# EAGLE board OpenBook_Schematic_v14 (EAGLE 9.7.0)
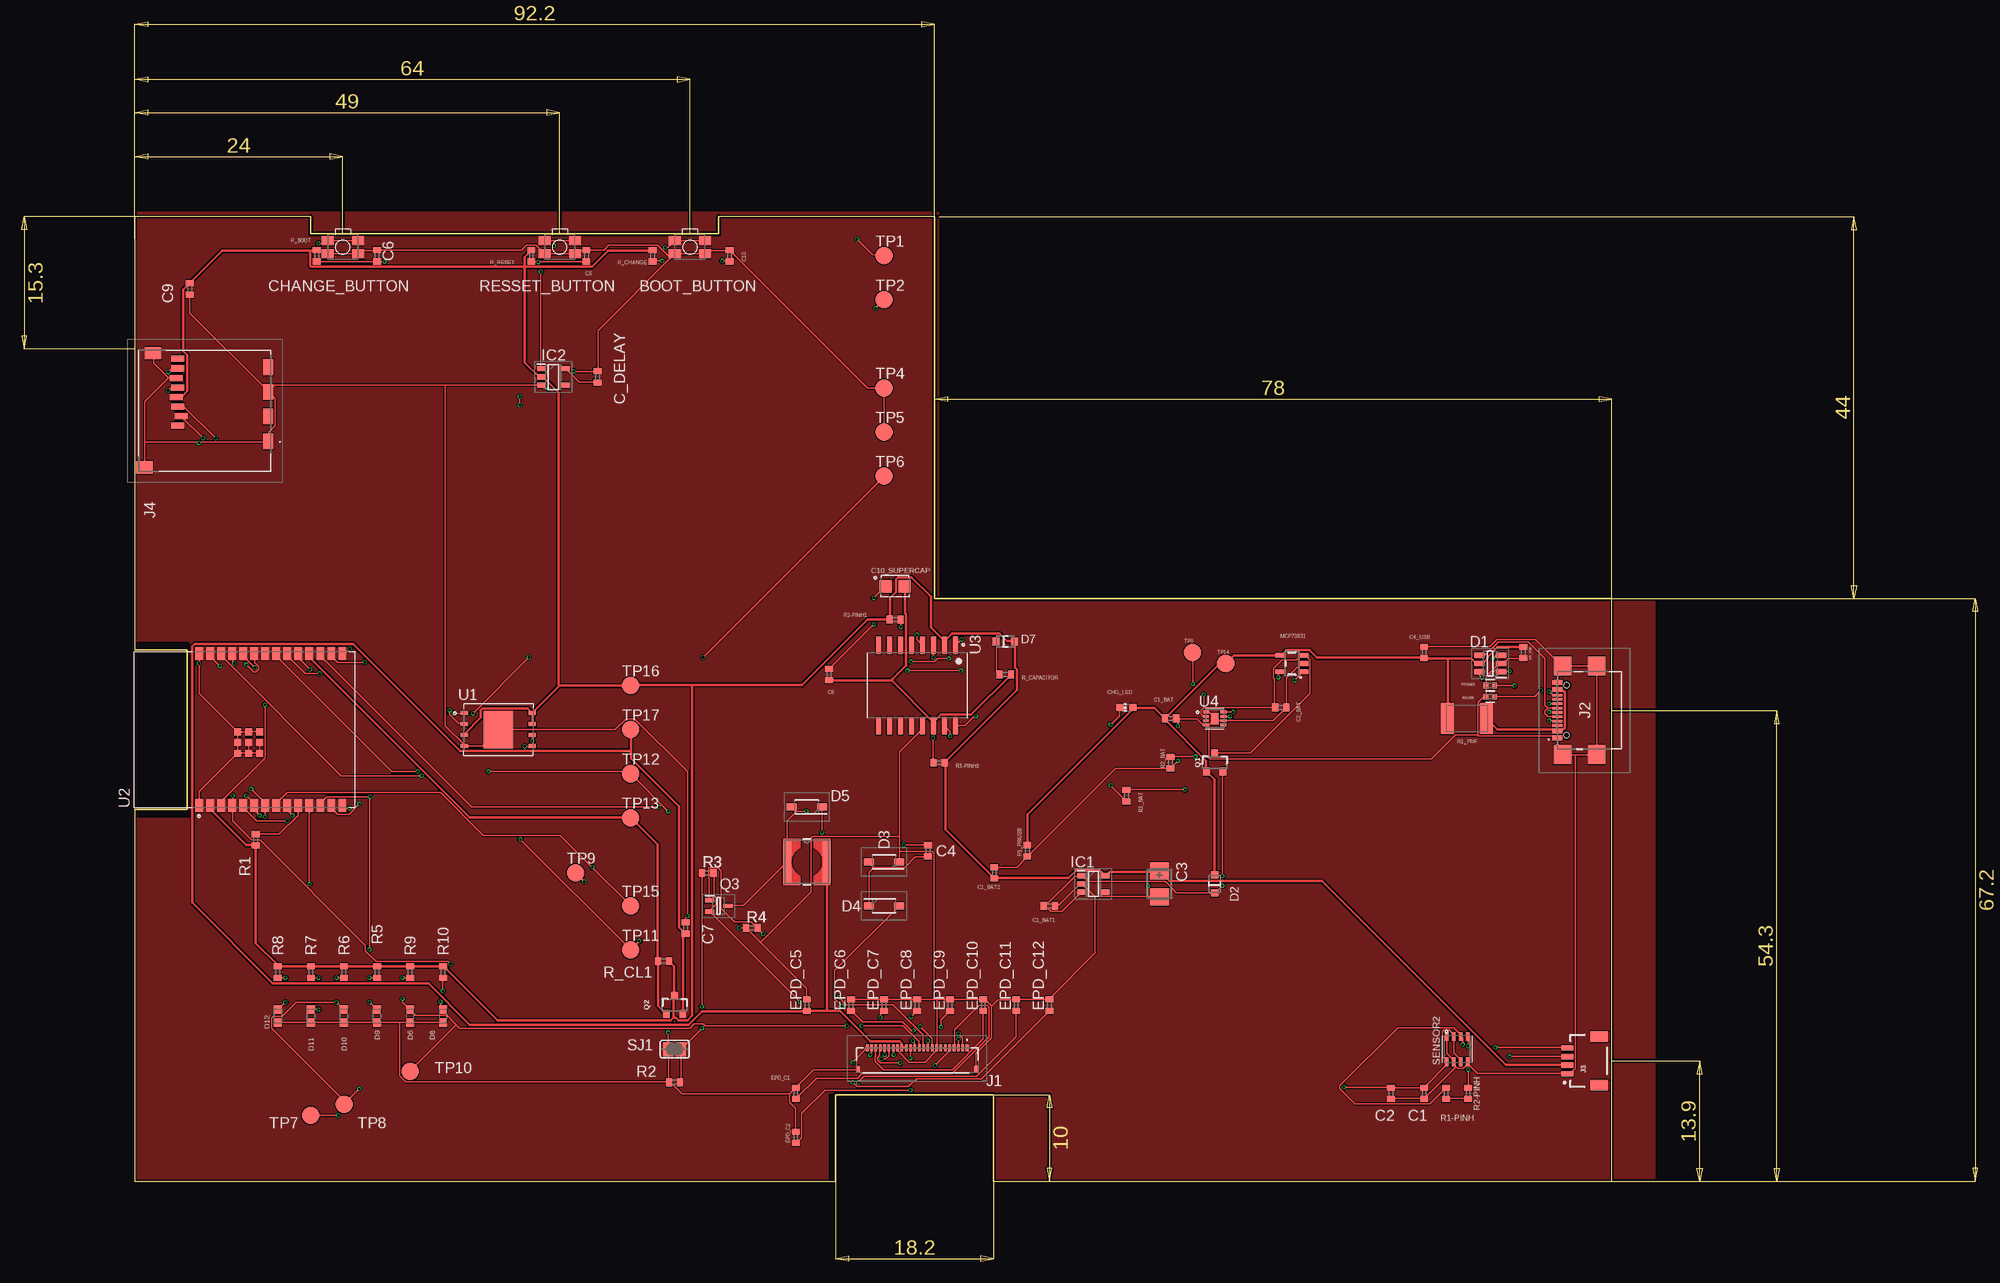
[diagram p0: board, top side]
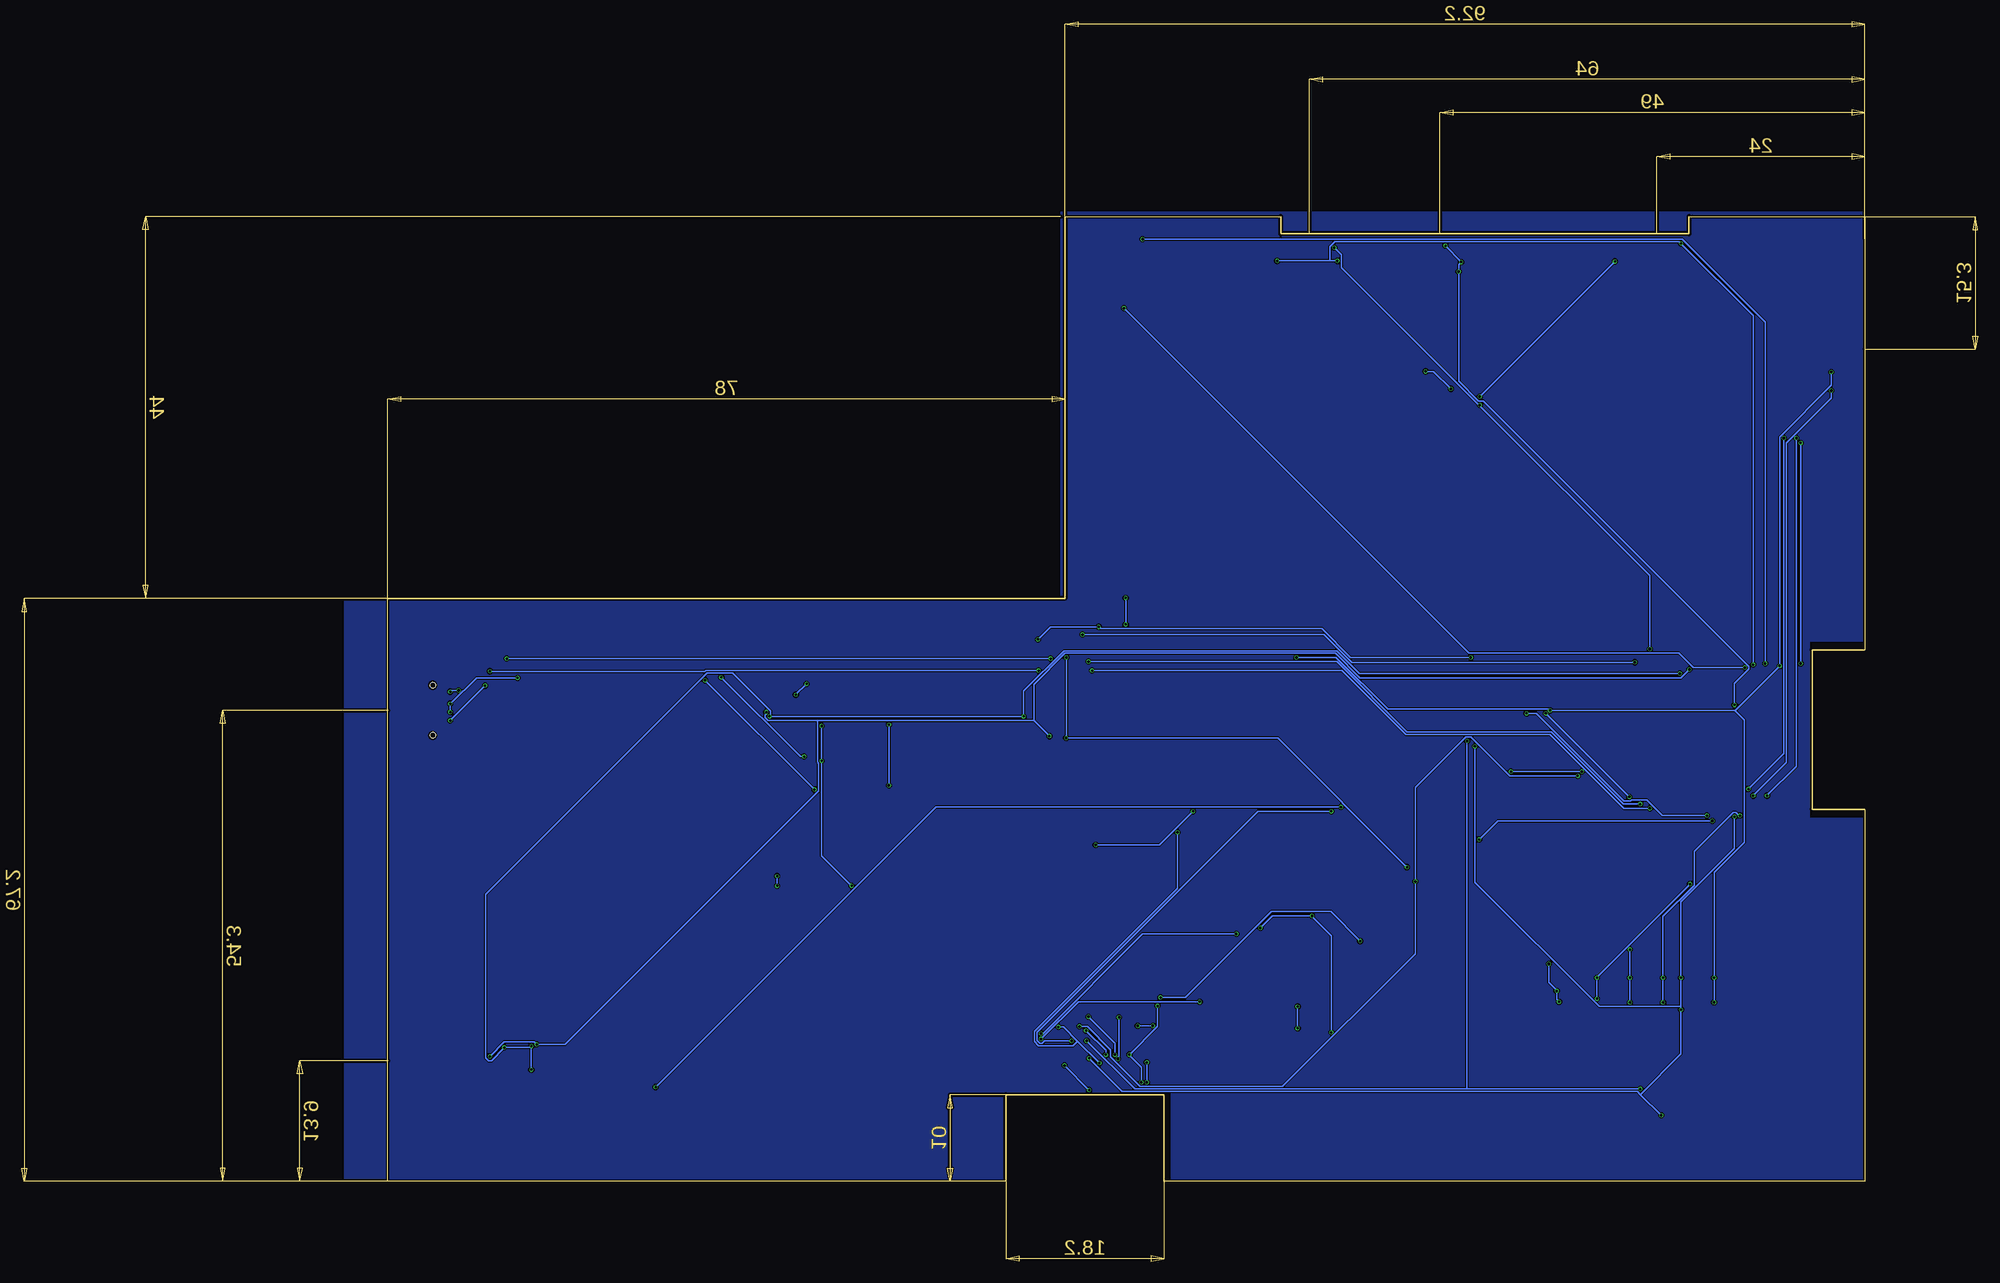
[diagram p1: board, bottom side, seen from below]

Size 170.2 x 111.2 mm. Coordinates in mm from the lower left corner, seen from the top.
Outline: 0,0 80.8,0 80.8,10 99,10 99,0 170.2,0 170.2,67.2 92.2,67.2 92.2,111.2 67.31,111.2 67.31,109.22 20.28,109.22 20.28,111.2 0,111.2 0,61.26 6.08,61.26 6.08,42.88 0,42.88 0,0
Copper layers (1*16): Top 0.035mm / dielectric 1.6mm / Bottom 0.035mm
Design rules "jlcpcb-2layers.dru": minimum track width 0.15mm, minimum drill 0.3mm, track to track 5mil, track to pad 5mil, pad to pad 5mil, via to via 5mil, smd to smd 5mil, copper to edge 0.2mm, drill to drill 6mil, minimum pad ring 10mil, minimum via ring 3mil, stop-mask expansion 4mil, vias tented up to drill 0mil, thermal gap 10mil
Net classes: 0 default: width 0.15 mm; 1 power: width 0.3 mm

## Footprints (pad centres in the part's own frame; a part is rotated, then mirrored left to right if it is on the bottom)
MYBUTTON = smd 1.4 x 1.05: 1 1.75,0.75; 2 -1.75,0.75; 3 -1.75,-0.75; 4 1.75,-0.75
EAGLE-LTSPICE_C0402 = smd 0.7 x 0.9: 1 -0.65,0; 2 0.65,0
RCL_CT3528 = smd 2 x 2.2: + -1.5,0; - 1.5,0
CAPCP3225X100N = smd 1.4 x 1.4: 1 -1.1,0; 2 1.1,0
ADAFRUIT_CHIP-LED0603 = smd 0.8 x 0.8: A 0,-0.75; C 0,0.75
SOT95P280X145-6N = smd 1.2 x 0.6: 1 -1.25,0.95; 2 -1.25,0; 3 -1.25,-0.95; 4 1.25,-0.95; 5 1.25,0; 6 1.25,0.95
ESP32_WROVER_AVX---SD0805S020S1R0_AVX_SD0805S020S1R0_0 = smd 0.8 x 0.9: 1 -1.05,0; 2 1.05,0
SOD3716X135N = smd 1.15 x 0.8: 1 -1.75,0; 2 1.75,0
DIOC1608X36N = smd 0.97 x 0.94: 1 -0.75,0; 2 0.75,0
SOT95P280X120-5N = smd 0.9 x 0.6: 1 -1.4,0.95; 2 -1.4,0; 3 -1.4,-0.95; 4 1.4,-0.95; 5 1.4,0.95
SOT95P280X125-5N = smd 0.9 x 0.6: 1 -1.4,0.95; 2 -1.4,0; 3 -1.4,-0.95; 4 1.4,-0.95; 5 1.4,0.95
FH34SRJ24S05SH99 = smd 0.3 x 0.8: 1 5.75,1.45; 2 5.25,1.45; 3 4.75,1.45; 4 4.25,1.45; 5 3.75,1.45; 6 3.25,1.45; 7 2.75,1.45; 8 2.25,1.45; 9 1.75,1.45; 10 1.25,1.45; 11 0.75,1.45; 12 0.25,1.45; 13 -0.25,1.45; 14 -0.75,1.45; 15 -1.25,1.45; 16 -1.75,1.45; 17 -2.25,1.45; 18 -2.75,1.45; 19 -3.25,1.45; 20 -3.75,1.45; 21 -4.25,1.45; 22 -4.75,1.45; 23 -5.25,1.45; 24 -5.75,1.45 | smd 0.4 x 0.8: MP1 6.75,-1.05; MP2 -6.75,-1.05
SAMACSYS_PARTS_USB4110GFA = smd 0.3 x 1.15: A1 -3.35,3.678; A4 -2.55,3.678; A5 -1.25,3.678; A6 -0.25,3.678; A7 0.25,3.678; A8 1.25,3.678; A9 2.55,3.678; A12 3.35,3.678; B1 3.05,3.678; B4 2.25,3.678; B5 1.75,3.678; B6 0.75,3.678; B7 -0.75,3.678; B8 -1.75,3.678; B9 -2.25,3.678; B12 -3.05,3.678 | smd 2.18 x 2: MP1 -5.11,-0.827; MP2 5.11,-0.827; MP3 -5.11,3.103; MP4 5.11,3.103 | hole 0.65: -2.89,2.603; 2.89,2.603
JST04_1MM_RA = smd 0.6 x 1.35: 1 -1.5,0; 2 -0.5,0; 3 0.5,0; 4 1.5,0 | smd 1.2 x 2: NC1 2.8,-3.675; NC2 -2.8,-3.675
112ATAARR03ATTEND = smd 1.8 x 1.2: G1 10.6,10.4; G2 4.9,10.4; S1 7.75,10.4; S2 2.05,10.4 | smd 1.4 x 1.9: G3 13.6,-3.85; G4 0.45,-2.85 | smd 0.7 x 1.5: P1 8.8,0; P2 7.7,0.4; P3 6.6,0; P4 5.5,-0.2; P5 4.4,0; P6 3.3,-0.2; P7 2.2,0; P8 1.1,0
IND_4828-WE-TPC_WRE = smd 0.889 x 4.826: 1 -2.286,0; 2 2.286,0
ESP32_WROVER_SPARKFUN-IC-POWER_SOT23-5 = smd 0.55 x 1.2: 1 -0.95,-1.3; 2 0,-1.3; 3 0.95,-1.3; 4 0.95,1.3; 5 -0.95,1.3
ESP32_WROVER_SPARKFUN-DISCRETESEMI_SOT23-3 = smd 0.8 x 0.9: 1 -0.95,-1; 2 0.95,-1; 3 0,1.1
SOT65P210X110-3N = smd 1.05 x 0.5: 1 -1.05,0.65; 2 -1.05,-0.65; 3 1.05,0
ESP32_WROVER_EAGLE-LTSPICE_R0402 = smd 0.7 x 0.9: 1 -0.65,0; 2 0.65,0
ESP32C6_VARISTOR_CT/CN1812 = smd 1.5 x 3.6: 1 -2.25,0; 2 2.25,0
RESC1005X40 = smd 0.535 x 0.644: 1 -0.507,0; 2 0.507,0
ESP32_WROVER_BME680_PSON80P300X300X100-8N = smd 1.016 x 0.5: 1 1.458,1.2; 2 1.458,0.4; 3 1.458,-0.4; 4 1.458,-1.2; 5 -1.458,-1.22; 6 -1.458,-0.4; 7 -1.458,0.4; 8 -1.458,1.2
SJ = smd 1.168 x 1.6: 1 -0.762,0; 2 0.762,0
TP20R = smd 2 x 2: TP 0,0
SON127P600X800X80-9N = smd 0.94 x 0.44: 1 -3.895,1.905; 2 -3.895,0.635; 3 -3.895,-0.635; 4 -3.895,-1.905; 5 3.895,-1.905; 6 3.895,-0.635; 7 3.895,0.635; 8 3.895,1.905 | smd 3.4 x 4.3: 9 0,0
XCVR_ESP32-C6-WROOM-1-N8 = smd 1.5 x 0.9: 1 -8.75,5.26; 2 -8.75,3.99; 3 -8.75,2.72; 4 -8.75,1.45; 5 -8.75,0.18; 6 -8.75,-1.09; 7 -8.75,-2.36; 8 -8.75,-3.63; 9 -8.75,-4.9; 10 -8.75,-6.17; 11 -8.75,-7.44; 12 -8.75,-8.71; 13 -8.75,-9.98; 14 -8.75,-11.25; 15 8.75,-11.25; 16 8.75,-9.98; 17 8.75,-8.71; 18 8.75,-7.44; 19 8.75,-6.17; 20 8.75,-4.9; 21 8.75,-3.63; 22 8.75,-2.36; 23 8.75,-1.09; 24 8.75,0.18; 25 8.75,1.45; 26 8.75,2.72; 27 8.75,3.99; 28 8.75,5.26 | smd 0.8 x 0.8: 29_1 -2.755,0.79; 29_2 -1.505,0.79; 29_3 -0.255,0.79; 29_4 -2.755,-0.46; 29_5 -1.505,-0.46; 29_6 -0.255,-0.46; 29_7 -2.755,-1.71; 29_8 -1.505,-1.71; 29_9 -0.255,-1.71
SOIC127P1032X265-16N = smd 2.05 x 0.59: 1 -4.655,4.445; 2 -4.655,3.175; 3 -4.655,1.905; 4 -4.655,0.635; 5 -4.655,-0.635; 6 -4.655,-1.905; 7 -4.655,-3.175; 8 -4.655,-4.445; 9 4.655,-4.445; 10 4.655,-3.175; 11 4.655,-1.905; 12 4.655,-0.635; 13 4.655,0.635; 14 4.655,1.905; 15 4.655,3.175; 16 4.655,4.445
SON50P200X200X80-9N = smd 0.76 x 0.27: 1 -0.985,0.75; 2 -0.985,0.25; 3 -0.985,-0.25; 4 -0.985,-0.75; 5 0.985,-0.75; 6 0.985,-0.25; 7 0.985,0.25; 8 0.985,0.75 | smd 0.9 x 1.3: 9 0,0

## Placement (x,y rotation side)
BOOT_BUTTON  BOOT_BUTTON  [MYBUTTON]  64,107.67 180 top
C1  100nF  [EAGLE-LTSPICE_C0402]  148.59,10.16 270 top
C1_BAT  4.7uF  [EAGLE-LTSPICE_C0402]  119.38,53.34 0 top
C1_BAT1  4.7uF  [EAGLE-LTSPICE_C0402]  105.41,31.75 0 top
C1_BAT2  4.7uF  [EAGLE-LTSPICE_C0402]  99.06,35.56 90 top
C2  100nF  [EAGLE-LTSPICE_C0402]  144.78,10.16 270 top
C2_BAT  4.7uF  [EAGLE-LTSPICE_C0402]  132.08,54.61 0 top
C3  100uF  [RCL_CT3528]  118.11,34.29 270 top
C4  4.7uF/25V  [EAGLE-LTSPICE_C0402]  91.44,38.1 90 top
C4_USB  100nF  [EAGLE-LTSPICE_C0402]  148.59,60.96 90 top
C5  1uF  [EAGLE-LTSPICE_C0402]  52.07,106.68 90 top
C5_USB  4.7uF  [EAGLE-LTSPICE_C0402]  160.02,60.96 270 top
C6  100nF  [EAGLE-LTSPICE_C0402]  27.94,106.68 90 top
C7  10uF  [EAGLE-LTSPICE_C0402]  63.5,29.21 90 top
C8  100nF  [EAGLE-LTSPICE_C0402]  80.01,58.42 90 top
C9  100nF  [EAGLE-LTSPICE_C0402]  6.35,102.87 270 top
C10  100nF  [EAGLE-LTSPICE_C0402]  68.58,106.68 90 top
C10_SUPERCAP  CPH3225A  [CAPCP3225X100N]  87.63,68.58 0 top
C_DELAY  100nF  [EAGLE-LTSPICE_C0402]  53.34,92.71 90 top
CHANGE_BUTTON  CHANGE_BUTTON  [MYBUTTON]  24,107.67 180 top
CHG_LED  [ADAFRUIT_CHIP-LED0603]  114.3,54.61 90 top
D1  USBLC6-2SC6Y  [SOT95P280X145-6N]  156.21,59.69 180 top
D2  ESP32_WROVER_AVX---SD0805S020S1R0_AVX_SD0805S020S1R0_0_0AVX_SD0805S020S1R0_0_0  [ESP32_WROVER_AVX---SD0805S020S1R0_AVX_SD0805S020S1R0_0]  124.46,34.29 90 top
D3  MBR0530  [SOD3716X135N]  86.36,36.83 180 top
D4  MBR0530  [SOD3716X135N]  86.36,31.75 0 top
D5  MBR0530  [SOD3716X135N]  77.47,43.18 180 top
D6  PGB1010603MR  [DIOC1608X36N]  31.75,19.05 90 top
D7  ESP32_WROVER_AVX---SD0805S020S1R0_AVX_SD0805S020S1R0_0_0AVX_SD0805S020S1R0_0_0  [ESP32_WROVER_AVX---SD0805S020S1R0_AVX_SD0805S020S1R0_0]  100.33,62.23 0 top
D8  PGB1010603MR  [DIOC1608X36N]  35.56,19.05 90 top
D9  PGB1010603MR  [DIOC1608X36N]  27.94,19.05 90 top
D10  PGB1010603MR  [DIOC1608X36N]  24.13,19.05 90 top
D11  PGB1010603MR  [DIOC1608X36N]  20.32,19.05 90 top
D12  PGB1010603MR  [DIOC1608X36N]  16.51,19.05 90 top
EPD_C1  1uF/50V  [EAGLE-LTSPICE_C0402]  76.2,10.16 90 top
EPD_C2  1uF/50V  [EAGLE-LTSPICE_C0402]  76.2,5.08 90 top
EPD_C5  1uF/50V  [EAGLE-LTSPICE_C0402]  77.47,20.32 90 top
EPD_C6  1uF/50V  [EAGLE-LTSPICE_C0402]  82.55,20.32 90 top
EPD_C7  1uF/50V  [EAGLE-LTSPICE_C0402]  86.36,20.32 90 top
EPD_C8  1uF/50V  [EAGLE-LTSPICE_C0402]  90.17,20.32 90 top
EPD_C9  1uF/50V  [EAGLE-LTSPICE_C0402]  93.98,20.32 90 top
EPD_C10  1uF/50V  [EAGLE-LTSPICE_C0402]  97.79,20.32 90 top
EPD_C11  1uF/50V  [EAGLE-LTSPICE_C0402]  101.6,20.32 90 top
EPD_C12  1uF/50V  [EAGLE-LTSPICE_C0402]  105.41,20.32 90 top
IC1  XC6220A331MR-G  [SOT95P280X120-5N]  110.49,34.29 0 top
IC2  BD5229G-TR  [SOT95P280X125-5N]  48.26,92.71 0 top
J1  FH34SRJ-24S-0.5SH_99_  [FH34SRJ24S05SH99]  90.17,13.97 0 top
J2  SAMACSYS_PARTS_USB4110-GF-A  [SAMACSYS_PARTS_USB4110GFA]  167.64,54.3 90 top
J3  QWIIC_RIGHT_ANGLE  [JST04_1MM_RA]  165.1,13.9 90 top
J4  112A-TAAR-R03_ATTEND  [112ATAARR03ATTEND]  5,95.9 270 top
L1  68Uh  [IND_4828-WE-TPC_WRE]  77.47,36.83 0 top
MCP73831  ESP32_WROVER_SPARKFUN-IC-POWER_MCP73831  [ESP32_WROVER_SPARKFUN-IC-POWER_SOT23-5]  133.35,59.69 90 top
Q1  20V/4.2A/52mΩ/1.4W  [ESP32_WROVER_SPARKFUN-DISCRETESEMI_SOT23-3]  124.46,48.26 0 top
Q2  20V/4.2A/52mΩ/1.4W  [ESP32_WROVER_SPARKFUN-DISCRETESEMI_SOT23-3]  62.23,20.32 0 top
Q3  SI1308EDL-T1-GE3  [SOT65P210X110-3N]  67.31,31.75 0 top
R1  10K  [ESP32_WROVER_EAGLE-LTSPICE_R0402]  13.97,39.37 270 top
R1-PINH  10K  [ESP32_WROVER_EAGLE-LTSPICE_R0402]  151.13,10.16 270 top
R1-PINH1  10K  [ESP32_WROVER_EAGLE-LTSPICE_R0402]  92.71,48.26 0 top
R1_BAT  200  [ESP32_WROVER_EAGLE-LTSPICE_R0402]  114.3,44.45 90 top
R1_PMF  PFMF.050.1  [ESP32C6_VARISTOR_CT/CN1812]  153.51,53.34 180 top
R1_PWUSB  100K  [ESP32_WROVER_EAGLE-LTSPICE_R0402]  102.87,38.1 90 top
R2  2.2  [ESP32_WROVER_EAGLE-LTSPICE_R0402]  62.23,11.43 0 top
R2-PINH  10K  [ESP32_WROVER_EAGLE-LTSPICE_R0402]  153.67,10.16 270 top
R2-PINH1  10K  [ESP32_WROVER_EAGLE-LTSPICE_R0402]  87.63,64.77 180 top
R2-USB  5k1  [RESC1005X40]  156.21,55.88 180 top
R2-USB1  5k1  [RESC1005X40]  156.21,57.15 0 top
R2_BAT  2K  [ESP32_WROVER_EAGLE-LTSPICE_R0402]  119.38,48.26 90 top
R3  0.47  [ESP32_WROVER_EAGLE-LTSPICE_R0402]  66.04,35.56 0 top
R4  10K  [ESP32_WROVER_EAGLE-LTSPICE_R0402]  71.12,29.21 0 top
R5  10K  [ESP32_WROVER_EAGLE-LTSPICE_R0402]  27.94,24.13 90 top
R6  10K  [ESP32_WROVER_EAGLE-LTSPICE_R0402]  24.13,24.13 90 top
R7  10K  [ESP32_WROVER_EAGLE-LTSPICE_R0402]  20.32,24.13 90 top
R8  10K  [ESP32_WROVER_EAGLE-LTSPICE_R0402]  16.51,24.13 90 top
R9  10K  [ESP32_WROVER_EAGLE-LTSPICE_R0402]  31.75,24.13 90 top
R10  10K  [ESP32_WROVER_EAGLE-LTSPICE_R0402]  35.56,24.13 90 top
R_BOOT  10K  [ESP32_WROVER_EAGLE-LTSPICE_R0402]  20.97,106.68 90 top
R_CAPACITOR  15  [ESP32_WROVER_EAGLE-LTSPICE_R0402]  100.33,58.42 0 top
R_CHANGE  10K  [ESP32_WROVER_EAGLE-LTSPICE_R0402]  59.69,106.68 90 top
R_CL1  10K  [ESP32_WROVER_EAGLE-LTSPICE_R0402]  60.96,25.4 0 top
R_RESET  10K  [ESP32_WROVER_EAGLE-LTSPICE_R0402]  45.72,106.68 90 top
RESSET_BUTTON  RESSET_BUTTON  [MYBUTTON]  49,107.67 180 top
SENSOR2  BME688  [ESP32_WROVER_BME680_PSON80P300X300X100-8N]  152.4,15.24 90 top
SJ1  [SJ]  62.23,15.24 0 top
TP1  TPTP20R  [TP20R]  86.36,106.68 0 top
TP2  TPTP20R  [TP20R]  86.36,101.6 0 top
TP3  TPTP20R  [TP20R]  121.92,60.96 0 top
TP4  TPTP20R  [TP20R]  86.36,91.44 0 top
TP5  TPTP20R  [TP20R]  86.36,86.36 0 top
TP6  TPTP20R  [TP20R]  86.36,81.28 0 top
TP7  TPTP20R  [TP20R]  20.32,7.62 0 top
TP8  TPTP20R  [TP20R]  24.13,8.89 0 top
TP9  TPTP20R  [TP20R]  50.8,35.56 0 top
TP10  TPTP20R  [TP20R]  31.75,12.7 0 top
TP11  TPTP20R  [TP20R]  57.15,26.67 0 top
TP12  TPTP20R  [TP20R]  57.15,46.99 0 top
TP13  TPTP20R  [TP20R]  57.15,41.91 0 top
TP14  TPTP20R  [TP20R]  125.73,59.69 0 top
TP15  TPTP20R  [TP20R]  57.15,31.75 0 top
TP16  TPTP20R  [TP20R]  57.15,57.15 0 top
TP17  TPTP20R  [TP20R]  57.15,52.07 0 top
U1  W25Q512JVEIQ  [SON127P600X800X80-9N]  41.91,52.07 0 top
U2  ESP32-C6-WROOM-1-N8  [XCVR_ESP32-C6-WROOM-1-N8]  12.7,52.07 90 top
U3  DS3231SN#  [SOIC127P1032X265-16N]  90.17,57.15 270 top
U4  MAX17048G+T10  [SON50P200X200X80-9N]  124.46,53.34 0 top

## Library data of the parts
BOOT_BUTTON CHANGE_BUTTON CHG_LED R1_PMF RESSET_BUTTON SJ1 TP1-TP17 = DeskAssistant v19 v1.flbr
C1 C1_BAT C1_BAT1 C1_BAT2 C2 C2_BAT C4 C4_USB C5 C5_USB C6-C10 C_DELAY EPD_C1 EPD_C2 EPD_C5-EPD_C12 = DeskAssistant v19 v1.flbr; SPICEMODEL: NONE; SPICEPREFIX: C
C3 = DeskAssistant v19 v1.flbr; SPICEPREFIX: C
C10_SUPERCAP = DeskAssistant v19 v1.flbr; AVAILABILITY: Not in stock; CHECK_PRICES: https://www.snapeda.com/parts/CPH3225A/Seiko+Instruments/view-part/?ref=eda; DESCRIPTION: 11 mF (EDLC) Supercapacitor 3.3 V 1210 (3225 Metric) - -; MF: Seiko Instruments; MP: CPH3225A; PACKAGE: 1210 Seiko; PRICE: None; PURCHASE-URL: https://www.snapeda.com/api/url_track_click_mouser/?unipart_id=562593&manufacturer=Seiko Instruments&part_name=CPH3225A&search_term=None; SNAPEDA_LINK: https://www.snapeda.com/parts/CPH3225A/Seiko+Instruments/view-part/?ref=snap
D1 = DeskAssistant v19 v1.flbr; AVAILABILITY: In Stock; CHECK_PRICES: https://www.snapeda.com/parts/USBLC6-2SC6Y/STMicroelectronics/view-part/?ref=eda; DESCRIPTION: 17V Clamp 5A (8/20µs) Ipp Tvs Diode Surface Mount SOT-23-6; MF: STMicroelectronics; MP: USBLC6-2SC6Y; PACKAGE: SOT-23-6 STMicroelectronics; PRICE: None; SNAPEDA_LINK: https://www.snapeda.com/parts/USBLC6-2SC6Y/STMicroelectronics/view-part/?ref=snap
D2 D7 = DeskAssistant v19 v1.flbr; CENTROID_NOT_SPECIFIED: No; DATASHEET: http://datasheets.avx.com/schottky.pdf; DIGIKEY_DESCRIPTION: DIODE SCHOTTKY 20V 1A 0805; DIGIKEY_PART_NUMBER: 478-7800-1-ND; LEAD_FREE: yes; MF: AVX; MOUSER_PART_NUMBER: 581-SD0805S020S1R0; PACKAGE: 0805 (2012 metric); PREFIX: D; ROHS: yes; TEMPERATURE_RANGE_HIGH: +125°C; TEMPERATURE_RANGE_LOW: -55°C
D3-D5 = DeskAssistant v19 v1.flbr; AVAILABILITY: In Stock; CHECK_PRICES: https://www.snapeda.com/parts/MBR0530/Onsemi/view-part/?ref=eda; DESCRIPTION: Diode Schottky 30 V 500mA Surface Mount SOD-123; MF: ON Semiconductor; MP: MBR0530; PACKAGE: SOD-123-2 ON Semiconductor; PRICE: None; PURCHASE-URL: https://www.snapeda.com/api/url_track_click_mouser/?unipart_id=179458&manufacturer=ON Semiconductor&part_name=MBR0530&search_term=None; SNAPEDA_LINK: https://www.snapeda.com/parts/MBR0530/Onsemi/view-part/?ref=snap
D6 D8-D12 = DeskAssistant v19 v1.flbr; AVAILABILITY: In Stock; CHECK_PRICES: https://www.snapeda.com/parts/PGB1010603MR/Littelfuse/view-part/?ref=eda; DESCRIPTION: 150V (Typ) Clamp - Ipp Tvs Diode Surface Mount 0603 (1608 Metric); MF: Littelfuse Inc.; MP: PGB1010603MR; PACKAGE: 0603 Littelfuse Inc.; PRICE: None; PURCHASE-URL: https://www.snapeda.com/api/url_track_click_mouser/?unipart_id=5659453&manufacturer=Littelfuse Inc.&part_name=PGB1010603MR&search_term=None; SNAPEDA_LINK: https://www.snapeda.com/parts/PGB1010603MR/Littelfuse/view-part/?ref=snap
IC1 = DeskAssistant v19 v1.flbr; DESCRIPTION: LDO Voltage Regulators; HEIGHT: 1.2mm; MANUFACTURER_NAME: Torex; MANUFACTURER_PART_NUMBER: XC6220A331MR-G; MOUSER_PART_NUMBER: 865-XC6220A331MR-G; MOUSER_PRICE-STOCK: https://www.mouser.co.uk/ProductDetail/Torex-Semiconductor/XC6220A331MR-G?qs=AsjdqWjXhJ8ZSWznL1J0gg%3D%3D
IC2 = DeskAssistant v19 v1.flbr; DESCRIPTION: Voltage Detector with Adjustable Delay Time: CMOS processes are utilized to develop high precision, low current consumption CMOS reset ICs that allow arbitrary setting of the delay time. The extensive lineup includes both Nch Open Drain and CMOS output types in a wide range of detection voltages (from 2.3V to 6.0V, in 0.1V steps), enabling selection of the ideal solution based on customer requirements. In addition, the entire series is of course both lead-free and RoHS-compliant.; HEIGHT: 1.25mm; MANUFACTURER_NAME: ROHM Semiconductor; MANUFACTURER_PART_NUMBER: BD5229G-TR; MOUSER_PART_NUMBER: 755-BD5229G-TR; MOUSER_PRICE-STOCK: https://www.mouser.co.uk/ProductDetail/ROHM-Semiconductor/BD5229G-TR?qs=4kLU8WoGk0vvnhrrYwdszw%3D%3D
J1 = DeskAssistant v19 v1.flbr; DESCRIPTION: 24 Position FFC, FPC Connector Contacts, Top and Bottom 0.020" (0.50mm) Surface Mount, Right Angle; HEIGHT: 1.1mm; MANUFACTURER_NAME: Hirose; MANUFACTURER_PART_NUMBER: FH34SRJ-24S-0.5SH(99); MOUSER_PART_NUMBER: 798-FH34SRJ24S05SH99; MOUSER_PRICE-STOCK: https://www.mouser.co.uk/ProductDetail/Hirose-Connector/FH34SRJ-24S-0.5SH99?qs=vcbW%252B4%252BSTIpKBl5ap9J8Fw%3D%3D
J2 = DeskAssistant v19 v1.flbr; DESCRIPTION: CONN USB 2.0 TYPE-C R/A SMT; HEIGHT: 3.26mm; MANUFACTURER_NAME: GCT (GLOBAL CONNECTOR TECHNOLOGY); MANUFACTURER_PART_NUMBER: USB4110-GF-A; MOUSER_PART_NUMBER: 640-USB4110-GF-A; MOUSER_PRICE-STOCK: https://www.mouser.co.uk/ProductDetail/GCT/USB4110-GF-A?qs=KUoIvG%2F9IlYiZvIXQjyJeA%3D%3D
J3 = DeskAssistant v19 v1.flbr; PROD_ID: CONN-13694
J4 = DeskAssistant v19 v1.flbr; DESCRIPTION: Micro SD Card Socket, Push-Push Type, Top Mount, SMT, H=1.83mm, 10u; HEIGHT: 1.9mm; MANUFACTURER_NAME: ATTEND; MANUFACTURER_PART_NUMBER: 112A-TAAR-R03 ATTEND
L1 = DeskAssistant v19 v1.flbr; COPYRIGHT: Copyright (C) 2024 Ultra Librarian. All rights reserved.; MANUFACTURER_PART_NUMBER: 744043680; MFR_NAME: Wurth Electronics
MCP73831 = DeskAssistant v19 v1.flbr; PROD_ID: IC-09995
Q1 Q2 = DeskAssistant v19 v1.flbr; PROD_ID: TRAN-14388
Q3 = DeskAssistant v19 v1.flbr; AVAILABILITY: In Stock; CHECK_PRICES: https://www.snapeda.com/parts/SI1308EDL-T1-GE3/Vishay+Siliconix/view-part/?ref=eda; DESCRIPTION: Si1308EDL-T1-GE3 N-channel MOSFET Transistor, 1.5 A, 30 V, 3-Pin SC-70 | Siliconix / Vishay SI1308EDL-T1-GE3; MF: Vishay Siliconix; MP: SI1308EDL-T1-GE3; PACKAGE: SOT-323 Vishay Semiconductor; PRICE: None; PURCHASE-URL: https://www.snapeda.com/api/url_track_click_mouser/?unipart_id=274603&manufacturer=Vishay Siliconix&part_name=SI1308EDL-T1-GE3&search_term=None; SNAPEDA_LINK: https://www.snapeda.com/parts/SI1308EDL-T1-GE3/Vishay+Siliconix/view-part/?ref=snap
R1 R1-PINH R1-PINH1 R1_BAT R1_PWUSB R2 R2-PINH R2-PINH1 R2_BAT R3-R10 R_BOOT R_CAPACITOR R_CHANGE R_CL1 R_RESET = DeskAssistant v19 v1.flbr; SPICEMODEL: NONE; SPICEPREFIX: R
R2-USB R2-USB1 = Tinkercad; CATEGORY: Resistor; SUB-CATEGORY: Fixed
SENSOR2 = DeskAssistant v19 v1.flbr; AVAILABILITY: Unavailable; DESCRIPTION: Integrated Environmental Unit; MF: Bosch Sensortec; MP: BME680; PACKAGE: LGA-8 Bosch Tools; PRICE: None
U1 = DeskAssistant v19 v1.flbr; AVAILABILITY: In Stock; CHECK_PRICES: https://www.snapeda.com/parts/W25Q512JVEIQ/Winbond+Electronics/view-part/?ref=eda; DESCRIPTION: FLASH - NOR Memory IC 512Mb (64M x 8) SPI - Quad I/O 133 MHz 8-WSON (8x6); MF: Winbond Electronics; MP: W25Q512JVEIQ; PACKAGE: Package; PRICE: None; SNAPEDA_LINK: https://www.snapeda.com/parts/W25Q512JVEIQ/Winbond+Electronics/view-part/?ref=snap
U2 = DeskAssistant v19 v1.flbr; AVAILABILITY: In Stock; CHECK_PRICES: https://www.snapeda.com/parts/ESP32-C6-WROOM-1-N8/Espressif+Systems/view-part/?ref=eda; DESCRIPTION: Multiprotocol Modules ESP32-C6 module, Wi-Fi 6 in 2.4 GHz band, Bluetooth 5, Zigbee 3.0 and Thread. ESP34-WROOM Compatible - ENGINEERING SAMPLE; MF: Espressif Systems; MP: ESP32-C6-WROOM-1-N8; PACKAGE: None; PRICE: None; SNAPEDA_LINK: https://www.snapeda.com/parts/ESP32-C6-WROOM-1-N8/Espressif+Systems/view-part/?ref=snap
U3 = DeskAssistant v19 v1.flbr; AVAILABILITY: In Stock; CHECK_PRICES: https://www.snapeda.com/parts/DS3231SN%23/Analog+Devices/view-part/?ref=eda; DESCRIPTION: Extremely Accurate I²C-Integrated RTC/TCXO/Crystal; MF: Analog Devices; MP: DS3231SN#; PACKAGE: SOIC-16 Maxim; PRICE: None; PURCHASE-URL: https://www.snapeda.com/api/url_track_click_mouser/?unipart_id=99048&manufacturer=Analog Devices&part_name=DS3231SN#&search_term=None; SNAPEDA_LINK: https://www.snapeda.com/parts/DS3231SN%23/Analog+Devices/view-part/?ref=snap
U4 = DeskAssistant v19 v1.flbr; AVAILABILITY: In Stock; CHECK_PRICES: https://www.snapeda.com/parts/MAX17048G+T10/Analog+Devices/view-part/?ref=eda; DESCRIPTION: 3µA 1-Cell/2-Cell Fuel Gauge with ModelGauge; MF: Analog Devices; MP: MAX17048G+T10; PACKAGE: TDFN-8 Maxim; PRICE: None; PURCHASE-URL: https://www.snapeda.com/api/url_track_click_mouser/?unipart_id=329239&manufacturer=Analog Devices&part_name=MAX17048G+T10&search_term=None; SNAPEDA_LINK: https://www.snapeda.com/parts/MAX17048G+T10/Analog+Devices/view-part/?ref=snap

## Nets
3V3 [power]: C1_BAT2.1 C3.+ C9.1 D7.2 IC1.5 IC2.2 J3.2 J4.P4 Q2.3 R1-PINH1.2 R1.2 R2-PINH1.2 R5.2 R6.2 R7.2 R8.2 R9.2 R10.2 R_BOOT.2 R_CHANGE.2 R_CL1.2 R_RESET.2 TP16.TP U1.3 U1.7 U1.8 U2.2 U3.2
32KHZ: R2-PINH1.1 U2.9 U3.1
DN: D1.4 J2.A7 J2.B7
DP: D1.6 J2.A6 J2.B6
EPD_3V3 [power]: C7.1 EPD_C5.1 J1.15 J1.16 L1.2 Q2.2 TP17.TP
EPD_3V3_C [power]: Q2.1 R_CL1.1 TP13.TP U2.18
EPD_BUSY: J1.9 TP9.TP U2.26
EPD_CS: D6.2 J1.12 R9.1 TP10.TP U2.11
EPD_DC: J1.11 TP11.TP U2.5
EPD_RST: J1.10 TP12.TP U2.21
FLASH_CS: D9.2 R5.1 U1.1 U2.12
GDR: J1.2 Q3.1 R4.2
GND: BOOT_BUTTON.1 BOOT_BUTTON.2 C1.2 C1_BAT1.2 C1_BAT2.2 C1_BAT.2 C2.2 C2_BAT.2 C3.- C4_USB.2 C5.2 C5_USB.2 C6.2 C7.2 C9.2 C10.2 C_DELAY.2 CHANGE_BUTTON.1 CHANGE_BUTTON.2 D1.2 D3.1 D6.1 D8.1 D9.1 D10.1 D11.1 D12.1 EPD_C1.2 EPD_C2.2 EPD_C5.2 EPD_C6.2 EPD_C7.2 EPD_C8.2 EPD_C9.2 EPD_C10.2 EPD_C11.2 EPD_C12.2 IC1.2 IC2.3 J1.8 J1.17 J1.MP1 J1.MP2 J2.A1 J2.A12 J2.B1 J2.B12 J2.MP1 J2.MP2 J2.MP3 J2.MP4 J3.1 J4.G1 J4.G2 J4.G3 J4.G4 J4.P6 MCP73831.2 R1_PWUSB.1 R2-USB1.1 R2-USB.2 R2.1 R2_BAT.1 R4.1 RESSET_BUTTON.1 RESSET_BUTTON.2 SENSOR2.1 SENSOR2.5 SENSOR2.7 SJ1.1 TP4.TP TP5.TP U1.4 U1.9 U2.1 U2.28 U2.29_1 U2.29_2 U2.29_3 U2.29_4 U2.29_5 U2.29_6 U2.29_7 U2.29_8 U2.29_9 U3.13 U4.1 U4.4 U4.6 U4.9
GPIO8: R1.1 U2.10
I2C_PW: C1.1 C2.1 SENSOR2.2 SENSOR2.6 SENSOR2.8 U2.17
INT_RTC: R1-PINH1.1 TP15.TP U2.8 U3.3
IO/BOOT: BOOT_BUTTON.3 BOOT_BUTTON.4 C6.1 R_BOOT.1 U2.15
IO/CHANGE: C10.1 CHANGE_BUTTON.3 CHANGE_BUTTON.4 R_CHANGE.1 U2.23
MISO: D12.2 J4.P7 R8.1 TP6.TP U1.2 U2.27
MOSI: D11.2 J1.14 J4.P3 R7.1 TP7.TP U1.5 U2.7
N$1: C1_BAT1.1 D2.1 IC1.1 IC1.3 Q1.2
N$2: J2.A5 R2-USB1.2
N$3: J2.B5 R2-USB.1
N$4: EPD_C12.1 J1.24
N$5: C4.1 D3.2 D4.1
N$6: CHG_LED.C R1_BAT.1
N$7: MCP73831.1 R1_BAT.2
N$8: R1-PINH.2 R2-PINH.2
N$9: MCP73831.5 R2_BAT.2
N$10: C_DELAY.1 IC2.5
N$11: D7.1 R_CAPACITOR.1
N$12: C8.2 C10_SUPERCAP.1
N$14: EPD_C10.1 J1.22
N$16: EPD_C8.1 J1.20
N$17: EPD_C7.1 J1.19
N$18: EPD_C6.1 J1.18
N$26: EPD_C2.1 J1.5
N$27: EPD_C1.1 J1.4
PREVGH: D5.1 EPD_C9.1 J1.21
PREVGL: D4.2 EPD_C11.1 J1.23
RESE: J1.3 Q3.2 R3.2
RESE': R2.2 R3.1 SJ1.2
RESET: C5.1 IC2.1 R_RESET.1 RESSET_BUTTON.3 RESSET_BUTTON.4 U2.3
RTC_RST: U2.16 U3.4
RX: TP2.TP U2.24
SCK: D10.2 J1.13 J4.P5 R6.1 TP8.TP U1.6 U2.6
SCL: J3.4 R2-PINH.1 SENSOR2.4 U2.20 U3.16 U4.7
SDA: J3.3 R1-PINH.1 SENSOR2.3 U2.19 U3.15 U4.8
SRC: C4.2 D5.2 L1.1 Q3.3
SS_SD: D8.2 J4.P2 R10.1 U2.4
TX: TP1.TP U2.25
USB_D+: D1.1 U2.14
USB_D-: D1.3 U2.13
VBAT: C2_BAT.1 MCP73831.3 Q1.3 TP3.TP U4.2 U4.3
VBUS [power]: C1_BAT.1 C4_USB.1 C5_USB.1 CHG_LED.A D1.5 D2.2 MCP73831.4 Q1.1 R1_PMF.2 R1_PWUSB.2 TP14.TP
VRTC [power]: C8.1 C10_SUPERCAP.2 R_CAPACITOR.2 U3.14
VUSB [power]: J2.A4 J2.A9 J2.B4 J2.B9 R1_PMF.1

## Tracks (layer width: path | path; a pad name or v marks a point on that pad's centre or on a via)
3V3
  Top 0.3: U2.2 8.73,43.28 8.73,42.94 12.88,38.78 13.92,38.78 R1.2 13.99,38.57 13.99,27.42 16.48,24.93 R8.2 16.55,24.79 20.29,24.79 R7.2 20.43,24.79 24.1,24.79 R6.2 24.24,24.79 27.91,24.79 R5.2 28.05,24.79 31.72,24.79 R9.2 31.86,24.79 35.52,24.79 R10.2 35.66,24.72 41.83,18.56 61.77,18.56 62.12,18.91 | R_CL1.2 61.63,25.35 62.19,24.79 62.19,21.47 Q2.3 62.12,21.33 62.12,18.91 | 44.94,105.4 44.94,106.51 45.7,107.27 R_RESET.2 | 44.94,105.4 44.94,94.39 46.6,92.73 46.81,92.73 IC2.2 46.95,92.66 47.16,92.66 48.89,90.92 48.89,57.27 48.96,57.13 | 44.94,105.4 52.7,105.4 54.57,107.27 59.62,107.27 R_CHANGE.2 | J4.P4 4.85,90.44 5.47,90.44 6.09,91.06 6.09,95.22 5.61,95.7 5.61,102.77 6.3,103.46 C9.1 6.44,103.6 10.11,107.27 20.22,107.27 | 20.22,107.27 20.91,107.27 R_BOOT.2 | 44.94,105.4 20.36,105.4 20.22,105.54 20.22,107.27 | J3.2 165.09,13.43 158.03,13.43 136.84,34.62 119.25,34.62 118.14,35.73 C3.+ 118,35.66 112.32,35.66 111.98,35.32 IC1.5 111.84,35.25 111.22,35.87 108.52,35.87 107.61,34.97 99.1,34.97 C1_BAT2.1 98.96,35.04 93.42,40.58 93.42,48.2 R1-PINH1.2 93.42,48.41 101.66,56.65 101.66,59 101.45,59.21 101.45,62.12 D7.2 101.31,62.26 100.55,62.26 99.65,63.16 94.18,63.16 93.42,62.39 U3.2 93.28,61.84 93.28,62.33 91.76,63.85 91.76,67.38 89.54,69.6 87.95,69.6 87.74,69.39 87.74,67.93 87.05,67.24 87.05,64.82 R2-PINH1.2 86.84,64.75 84.48,64.75 76.94,57.2 64.26,57.2 | U1.3 38.02,51.45 38.02,51.59 39.89,53.46 39.89,54.29 40.1,54.5 45.29,54.5 45.77,54.02 U1.8 | U1.7 45.84,52.77 45.84,53.88 U1.8 | 48.96,57.13 57.13,57.13 TP16.TP 57.27,57.2 64.26,57.2
  Top 0.3: 48.96,57.13 45.91,54.08 U1.8 | 64.26,57.2 64.26,19.11 63.71,18.56 62.67,18.56 62.39,18.84 62.26,18.84 62.12,18.91
32KHZ  (via drill 0.3)
  Top 0.15: v88.29,63.92 88.29,64.75 R2-PINH1.1 | v95.29,62.46 94.67,61.84 U3.1 | v18.21,42.17 17.66,42.73 17.66,43.28 U2.9 | v45.43,60.39 v38.99,53.95
  Bottom 0.15: v95.29,62.46 93.83,63.92 v88.29,63.92 88.22,63.92 88.02,63.71 62.6,63.71 59.28,60.39 v45.43,60.39 | v18.21,42.17 23.34,42.17 25.14,43.97 26.87,43.97 27.01,43.84 27.77,43.84 37.88,53.95 v38.99,53.95
DN
  Top 0.15: 162.84,54.53 162.88,54.57 163.91,54.57 J2.A7 | 162.84,54.53 162.53,54.22 162.53,53.95 162.88,53.6 163.91,53.6 J2.B7 | 162.84,54.53 162.53,54.85 162.53,60.25 160.59,62.19 157.13,62.19 155.6,60.66 154.98,60.66 D1.4
DP  (via drill 0.3)
  Top 0.15: v163.01,54.08 163.91,54.08 J2.A6 | v163.01,55.05 163.91,55.05 J2.B6 | v155.26,58.03 154.98,58.31 154.98,58.72 D1.6
  Bottom 0.15: v163.01,54.08 v163.01,55.05 162.94,55.05 159.97,58.03 v155.26,58.03
EPD_3V3
  Top 0.3: J1.15 88.92,15.44 88.43,15.44 J1.16 88.36,15.58 88.36,15.93 88.16,16.14 84.83,16.14 81.3,19.67 79.78,19.67 | 79.78,19.67 77.49,19.67 EPD_C5.1 77.35,19.6 65.37,19.6 63.85,18.07 38.64,18.07 33.86,22.85 15.93,22.85 6.65,32.13 6.65,61.63 6.92,61.91 25.21,61.91 37.53,49.58 57.2,49.58 | 79.78,19.67 79.78,36.77 L1.2 | Q2.2 63.23,19.32 63.23,28.32 63.43,28.53 C7.1 63.36,28.67 62.74,29.29 62.74,43.21 57.2,48.75 57.2,49.58 | 57.2,49.58 57.2,52.01 TP17.TP
EPD_3V3_C
  Top 0.3: Q2.1 61.22,19.32 60.32,20.22 60.32,25.35 R_CL1.1 60.25,25.48 60.25,38.85 57.27,41.83 TP13.TP 57.13,41.97 38.64,41.97 20.15,60.45 20.15,60.8 U2.18
EPD_BUSY  (via drill 0.3)
  Top 0.15: v90.51,17.87 91.89,16.48 91.89,15.44 J1.9 | v51.8,34.56 50.83,35.52 TP9.TP | v33.1,46.74 23.82,46.74 10.04,60.52 10.04,60.8 U2.26
  Bottom 0.15: v90.51,17.87 89.61,17.87 86.91,15.17 86.91,14.34 83.52,10.94 67.1,10.94 51.8,26.25 v51.8,34.56 51.8,45.43 45.98,51.24 45.43,51.24 40.93,46.74 v33.1,46.74
EPD_CS  (via drill 0.3)
  Top 0.15: v83.79,17.94 88.57,17.94 90.37,16.14 90.37,15.44 J1.12 | v82.06,17.94 65.72,17.94 65.51,18.14 64.47,18.14 63.99,17.66 37.46,17.66 37.08,18.04 | 37.08,18.04 36.01,19.11 32.41,19.11 31.79,19.74 D6.2 31.72,19.8 30.89,20.64 v30.89,21.05 | v30.89,23.48 31.72,23.48 R9.1 | v20.15,34.28 20.15,43.28 U2.11 | 37.08,18.04 31.79,12.74 TP10.TP
  Bottom 0.15: v82.06,17.94 v83.79,17.94 | v30.89,21.05 v30.89,23.48 30.89,23.55 v20.15,34.28
EPD_DC  (via drill 0.3)
  Top 0.15: v81.16,21.19 81.99,20.36 87.39,20.36 90.86,16.9 90.86,15.44 J1.11 | v58.17,27.7 57.2,26.73 TP11.TP 57.13,26.73 v44.46,39.4 | v17.59,41.55 14.06,41.55 12.53,43.07 12.53,43.28 U2.5
  Bottom 0.15: v81.16,21.19 78.32,21.19 68.42,31.09 61.56,31.09 v58.17,27.7 | v17.59,41.55 42.31,41.55 v44.46,39.4
EPD_RST  (via drill 0.3)
  Top 0.15: v91.41,16.2 91.41,15.44 J1.10 | v61.49,42.66 57.2,46.95 TP12.TP 57.13,47.02 56.92,47.23 v40.79,47.23 | v32.62,47.23 29.64,47.23 16.34,60.52 16.34,60.8 U2.21
  Bottom 0.15: v91.41,16.2 94.53,16.2 94.8,15.93 95.08,15.93 95.43,16.27 95.43,17.17 69.94,42.66 v61.49,42.66 | v40.79,47.23 v32.62,47.23
FLASH_CS  (via drill 0.3)
  Top 0.15: v27.08,23.48 27.91,23.48 R5.1 | v27.08,20.64 27.91,19.8 D9.2 | v36.77,53.95 37.95,53.95 U1.1 | U2.12 21.47,43.35 21.47,43.63 22.16,44.32 v27.15,44.32 27.08,44.25 v27.08,26.73
  Bottom 0.15: v27.08,20.64 v27.08,23.48 v27.08,26.73 | v27.15,44.32 v36.77,53.95
GDR  (via drill 0.3)
  Top 0.15: v94.94,17.04 95.43,16.55 95.43,15.44 J1.2 | v72.44,28.53 71.81,29.15 R4.2 71.74,29.22 71.05,29.92 69.11,29.92 67.59,31.44 67.59,35.8 67.17,36.22 66.2,36.22 66.13,36.15 66.13,34.97 66.2,34.9 66.2,32.41 Q3.1
  Bottom 0.15: v94.94,17.04 94.73,17.04 83.24,28.53 v72.44,28.53
GND  (via drill 0.3)
  Top 0.15: TP5.TP 86.36,86.42 86.36,91.41 TP4.TP 86.28,91.41 84.48,91.41 68.63,107.27 C10.2 68.56,107.27 66.13,107.27 65.79,106.92 BOOT_BUTTON.2 65.72,106.92 BOOT_BUTTON.1 | CHANGE_BUTTON.1 22.3,106.92 25.69,106.92 CHANGE_BUTTON.2 26.11,107.27 27.91,107.27 C6.2 27.98,107.34 44.6,107.34 45.15,107.89 46.26,107.89 47.23,106.92 RESSET_BUTTON.1 47.3,106.92 50.69,106.92 RESSET_BUTTON.2 51.11,107.27 52.01,107.27 C5.2 54.08,107.34 54.64,107.89 60.25,107.89 61.7,106.44 BOOT_BUTTON.1 | BOOT_BUTTON.1 62.19,106.85 53.39,98.06 53.39,93.42 C_DELAY.2 53.32,93.35 v50.62,93.35 | U2.29_9 14.4,51.87 13.23,51.87 U2.29_6 13.09,51.8 11.98,51.8 U2.29_3 | U2.29_1 11.91,49.38 U2.29_2 11.91,50.62 11.91,51.8 U2.29_3 | U2.29_4 13.16,49.38 11.98,49.38 U2.29_1 | U2.29_5 13.16,49.44 U2.29_4 | U2.29_4 13.23,49.38 14.4,49.38 U2.29_7 14.4,49.44 U2.29_8 | U2.1 7.48,43.35 7.48,44.94 11.84,49.31 U2.29_1 | 7.48,59.69 7.48,56.23 11.84,51.87 U2.29_3 | 7.48,59.69 7.48,60.8 U2.28 | 3.88,92.66 4.78,92.66 J4.P6 | 3.88,92.66 2.22,94.32 2.22,95.43 J4.G4 | 1.18,85.18 1.18,89.89 3.88,92.59 3.88,92.66 | 1.18,85.18 1.18,82.34 J4.G3 | C9.2 6.37,102.21 6.37,100.07 15.37,91.06 J4.G2 | 35.8,91.76 16.14,91.76 15.44,91.06 J4.G2 | 35.8,91.76 46.81,91.76 IC2.3 46.88,91.69 47.23,91.34 v47.71,91.34 | J4.G2 15.44,91 16.2,90.23 16.2,87.12 15.44,86.36 15.44,85.32 J4.G1 15.37,85.25 15.3,85.18 7.41,85.18 | 7.41,85.18 1.18,85.18 | v7.41,59.69 7.48,59.69 | v7.41,85.11 7.41,85.18 | D8.1 35.52,18.35 31.79,18.35 D6.1 31.72,18.35 30.54,18.35 | D12.1 16.55,18.35 20.29,18.35 D11.1 20.36,18.35 24.1,18.35 D10.1 24.17,18.35 27.91,18.35 D9.1 27.98,18.35 30.54,18.35
  Top 0.15: R2.1 61.56,11.49 61.56,15.17 61.49,15.23 SJ1.1 61.49,15.3 v61.49,17.17 | J1.MP2 83.38,12.88 78.25,12.88 76.24,10.87 EPD_C1.2 76.17,10.8 75.48,10.11 | 75.48,10.11 75.48,9.14 76.17,8.45 76.17,5.75 EPD_C2.2 | 75.48,10.11 63.09,10.11 61.77,11.43 61.63,11.43 R2.1 | 30.54,18.35 30.54,12.19 31.23,11.49 61.49,11.49 R2.1 | C2.2 144.8,9.56 148.54,9.56 C1.2 148.61,9.56 152.28,13.23 | 152.28,13.23 152.49,13.02 153.11,13.02 153.6,13.5 153.6,13.78 SENSOR2.5 153.67,13.5 154.7,12.46 165.09,12.46 J3.1 165.16,12.46 165.44,12.46 165.99,13.02 165.99,49.17 | 152.28,13.23 152,13.5 SENSOR2.7 151.94,13.85 151.94,14.06 151.24,14.75 151.24,16.69 SENSOR2.1 | J2.B1 163.98,57.41 163.98,57.62 J2.A12 163.98,57.69 163.98,58.86 164.47,59.35 J2.MP4 | C4_USB.2 148.61,61.63 156.16,61.63 156.99,62.46 161.42,62.46 164.47,59.42 J2.MP4 | J2.MP4 164.61,59.42 168.42,59.42 J2.MP2 168.49,59.35 168.49,49.24 J2.MP1 168.42,49.17 165.99,49.17 | C5_USB.2 159.97,60.25 158.31,60.25 157.75,59.69 157.47,59.69 D1.2 157.41,59.62 157.13,59.62 155.74,58.24 155.74,57.2 R2-USB1.1 155.74,57.13 155.74,55.88 R2-USB.2 155.67,55.82 155.4,55.82 154.77,55.19 154.77,51.45 | 165.99,49.17 164.61,49.17 J2.MP3 164.47,49.24 163.98,49.72 163.98,50.9 J2.A1 163.98,50.97 163.98,51.24 J2.B12 163.91,51.31 154.91,51.31 154.77,51.45 | 72.12,27.53 70.5,29.15 R4.1 70.43,29.22 v69.67,29.22 | 72.12,27.53 77.42,22.23 77.42,20.98 EPD_C5.2 | C7.2 63.5,29.92 63.5,30.4 v63.71,30.61 63.71,47.23 57.62,53.32 56.65,53.32 55.4,52.08 41.97,52.08 U1.9 41.9,52.01 40.1,50.21 38.02,50.21 U1.4 38.02,50.28 35.8,52.49 35.8,91.76
  Top 0.15: U4.4 123.54,52.63 123.82,52.63 124.51,53.32 U4.9 | U4.1 123.54,54.08 123.82,54.08 124.51,53.39 U4.9 | U4.9 124.58,53.32 124.79,53.12 125.41,53.12 U4.6 125.48,53.12 131.23,53.12 132.68,54.57 C2_BAT.2 132.75,54.64 132.75,58.03 134.34,59.62 134.62,59.62 MCP73831.2 | U4.4 123.47,52.63 123.13,52.63 122.43,53.32 120.08,53.32 C1_BAT.2 120.22,53.25 v120.22,52.49 | C1_BAT2.2 99.1,36.22 101.66,36.22 102.84,37.4 R1_PWUSB.1 102.91,37.46 113.02,47.58 119.32,47.58 R2_BAT.1 119.39,47.64 v120.22,48.48 | 88.16,39.75 88.16,49.51 90.79,52.15 90.79,52.49 U3.13 | 88.16,39.75 88.16,38.02 | 88.16,38.02 88.16,36.84 D3.1 | J1.17 87.95,15.37 87.95,15.03 89.26,13.71 91.06,13.71 92.38,15.03 92.38,15.37 J1.8 92.45,15.44 92.45,20.98 | EPD_C6.2 82.61,20.98 86.36,20.98 EPD_C7.2 86.42,20.98 90.16,20.98 EPD_C8.2 90.23,20.98 92.1,20.98 | 92.1,20.98 92.45,20.98 | 92.45,20.98 93.97,20.98 EPD_C9.2 94.04,20.98 97.78,20.98 EPD_C10.2 97.85,20.91 98.06,20.91 98.75,20.22 | C1_BAT1.2 106.09,31.79 106.44,31.79 108.93,34.28 109.07,34.28 IC1.2 109.14,34.35 110.66,32.83 | 110.66,32.83 116.75,32.83 | 116.75,32.83 118.07,32.83 C3.- | 98.75,20.22 98.75,16.55 96.95,14.75 96.95,12.95 J1.MP1 | 98.75,20.22 98.82,20.22 99.51,20.91 101.59,20.91 EPD_C11.2 101.66,20.98 105.4,20.98 EPD_C12.2 105.4,21.05 110.66,26.32 110.66,32.83 | 88.16,38.02 91.96,38.02 92.1,37.88 92.1,20.98 | 116.75,32.83 v116.75,34.07 | 72.12,27.53 77.97,33.38 77.97,39.61 78.11,39.75 88.16,39.75 | 154.77,51.45 152.21,51.45 149.44,48.68 123.96,48.68 123.82,48.82 123.82,52.56 U4.4
  Bottom 0.15: v7.41,85.11 v7.41,59.69 | v50.62,93.35 49.72,93.35 v47.71,91.34 | v69.67,29.22 68.28,30.61 v63.71,30.61 63.71,30.54 61.49,28.32 v61.49,17.17 | v120.22,52.49 v120.22,48.48 120.22,37.53 v116.75,34.07
GPIO8
  Top 0.15: R1.1 13.99,40.03 16.69,40.03 18.84,42.17 18.84,43.28 U2.10
I2C_PW  (via drill 0.3)
  Top 0.15: SENSOR2.6 152.77,13.85 152.77,14.06 152,14.82 SENSOR2.2 151.94,16.76 151.94,17.04 151.52,17.45 150.9,17.45 150.69,17.24 150.69,14.34 151.17,13.85 SENSOR2.8 151.17,13.78 151.17,13.43 148.61,10.87 C1.1 148.54,10.8 144.8,10.8 C2.1 144.73,10.87 v139.33,10.87 | v60.39,43.14 38.85,43.14 21.47,60.52 21.47,60.8 U2.17
  Bottom 0.15: v60.39,43.14 107.06,43.14 v139.33,10.87
INT_RTC  (via drill 0.3)
  Top 0.15: v92.03,51.11 92.03,48.27 R1-PINH1.1 | v92.03,60.39 92.03,61.77 U3.3 | 52.73,36.18 57.13,31.79 TP15.TP | 52.73,36.18 49.03,39.89 40.16,39.89 35.25,44.8 17.59,44.8 16.34,43.56 16.34,43.35 U2.8 | v52.77,36.22 52.73,36.18
  Bottom 0.15: v92.03,60.39 v92.03,51.11 67.66,51.11 v52.77,36.22
IO/BOOT  (via drill 0.3)
  Top 0.15: R_BOOT.1 20.98,106.02 27.91,106.02 C6.1 27.98,106.02 v28.81,106.02 | BOOT_BUTTON.3 65.72,108.44 62.26,108.44 BOOT_BUTTON.4 62.19,108.38 61.42,107.61 v61.15,107.61 | v24.79,61.35 24.31,60.87 23.96,60.87 U2.15 | v44.39,89.47 v44.39,90.44
  Bottom 0.15: v24.79,61.35 24.79,69.8 44.42,89.44 | 44.42,89.44 60.32,105.33 60.32,106.78 v61.15,107.61 | v28.81,106.02 v44.39,90.44 | v44.39,89.47 44.42,89.44
IO/CHANGE  (via drill 0.3)
  Top 0.15: v60.8,106.09 59.69,106.09 R_CHANGE.1 | v67.73,106.09 68.56,106.09 C10.1 | CHANGE_BUTTON.3 25.69,108.44 22.3,108.44 CHANGE_BUTTON.4 22.23,108.38 21.95,108.1 v21.19,108.1 | v12.88,59.55 13.71,58.72 13.99,58.72 14.34,59.07 14.34,59.35 13.85,59.83 13.85,60.8 U2.23
  Bottom 0.15: v67.73,106.09 61.63,106.09 | 61.63,106.09 v60.8,106.09 | v12.88,59.55 12.88,99.79 v21.19,108.1 21.26,108.1 21.47,108.31 61.08,108.31 61.63,107.75 61.63,106.09
MISO  (via drill 0.3)
  Top 0.15: v17.38,23.48 16.55,23.48 R8.1 | v17.38,20.64 16.55,19.8 D12.2 | v36.29,54.29 36.29,53.81 37.33,52.77 37.95,52.77 U1.2 | v9.83,59.42 8.73,60.52 8.73,60.8 U2.27 | v3.88,93.28 4.29,93.69 4.99,93.69 J4.P7 | v65.51,60.39 86.36,81.23 TP6.TP
  Bottom 0.15: v17.38,20.64 v17.38,23.48 17.38,35.59 13.92,39.06 13.92,53.18 14.96,54.22 14.96,54.29 | 14.96,54.29 v36.29,54.29 36.36,54.29 36.49,54.43 54.98,54.43 60.94,60.39 v65.51,60.39 | 14.96,54.29 v9.83,59.42 9.83,85.8 3.88,91.76 v3.88,93.28
MOSI  (via drill 0.3)
  Top 0.15: v89.4,14.2 89.4,15.37 J1.14 | v23.48,7.62 20.36,7.62 TP7.TP | v21.19,23.48 20.36,23.48 R7.1 | v44.94,50.14 45.77,50.14 U1.5 | v21.19,19.8 20.36,19.8 D11.2 | v15.03,42.03 15.03,43.28 U2.7 15.03,43.35 15.03,43.63 v13.43,45.22 | v9.35,85.66 5.75,89.26 5.05,89.26 J4.P3
  Bottom 0.15: v89.4,14.2 85.59,10.39 26.25,10.39 25.86,10.01 | v23.48,7.62 25.86,10.01 | 21.19,20.15 v21.19,19.8 21.19,14.68 25.86,10.01 | 21.19,20.15 v21.19,23.48 21.19,32.2 15.03,38.36 v15.03,42.03 | v44.94,50.14 44.94,34.49 30.61,20.15 21.19,20.15 | v9.35,85.66 9.35,49.31 v13.43,45.22
N$1  (via drill 0.3)
  Top 0.15: IC1.3 109.07,33.31 106.85,31.09 105.61,31.09 104.98,31.72 104.78,31.72 C1_BAT1.1 104.98,31.79 108.38,35.18 109.07,35.18 IC1.1 109.14,35.18 109.28,35.18 109.9,34.56 118.76,34.56 120.08,33.24 D2.1 124.51,33.24 v125.34,34.07 | v125.34,35.18 125.34,47.23 Q1.2
  Bottom 0.15: v125.34,34.07 v125.34,35.18
N$2  (via drill 0.3)
  Top 0.15: v159,57.13 156.78,57.13 R2-USB1.2 | v163.01,53.12 163.91,53.12 J2.A5
  Bottom 0.15: v163.01,53.12 v159,57.13
N$3  (via drill 0.3)
  Top 0.15: v162.04,56.58 161.35,55.88 156.78,55.88 R2-USB.1 | v163.01,56.44 163.36,56.09 163.91,56.09 J2.B5
  Bottom 0.15: v162.04,56.58 162.88,56.58 v163.01,56.44
N$4  (via drill 0.3)
  Top 0.15: v82.75,13.71 84.42,15.37 J1.24 | v82.75,11.43 83.24,10.94 89.19,10.94 90.09,11.84 97.57,11.84 105.4,19.67 EPD_C12.1
  Bottom 0.15: v82.75,11.43 v82.75,13.71
N$5
  Top 0.15: 85.18,36.22 88.78,36.22 89.96,37.4 91.41,37.4 C4.1 | 85.18,36.22 84.62,36.77 D3.2 | D4.1 84.62,31.79 84.62,35.59 85.18,36.15 85.18,36.22
N$6  (via drill 0.3)
  Top 0.15: v112.46,52.63 113.5,53.67 113.5,54.57 CHG_LED.C | v112.46,45.64 114.26,43.84 R1_BAT.1
  Bottom 0.15: v112.46,45.64 v112.46,52.63
N$7  (via drill 0.3)
  Top 0.15: v121.05,45.15 114.33,45.15 R1_BAT.2 | v133.65,57.76 134.62,58.72 MCP73831.1
  Bottom 0.15: v133.65,57.76 v121.05,45.15
N$8
  Top 0.15: R1-PINH.2 151.17,9.56 153.67,9.56 R2-PINH.2
N$9  (via drill 0.3)
  Top 0.15: v122.23,48.96 119.39,48.96 R2_BAT.2 | v131.78,58.1 131.78,58.52 131.99,58.72 MCP73831.5
  Bottom 0.15: v122.23,48.96 122.64,48.96 v131.78,58.1
N$10
  Top 0.15: C_DELAY.1 53.32,92.1 51.24,92.1 49.72,93.63 IC2.5
N$11
  Top 0.15: D7.1 99.31,62.19 99.31,58.79 99.65,58.45 R_CAPACITOR.1
N$12  (via drill 0.3)
  Top 0.15: v85.18,64.19 80.05,59.07 C8.2 | v85.18,67.24 86.49,68.56 C10_SUPERCAP.1
  Bottom 0.15: v85.18,67.24 v85.18,64.19
N$14
  Top 0.15: J1.22 85.39,15.37 85.39,14.47 85.32,14.4 85.32,13.85 86.28,12.88 94.25,12.88 97.78,16.41 EPD_C10.1
N$16  (via drill 0.3)
  Top 0.15: v86.42,14.61 86.42,15.37 J1.20 | v89.47,18.97 EPD_C8.1
  Bottom 0.15: v86.42,14.61 86.42,15.93 v89.47,18.97
N$17  (via drill 0.3)
  Top 0.15: v86.08,14.13 86.56,14.13 86.91,14.47 86.91,15.37 J1.19 | v85.94,18.91 85.94,19.25 EPD_C7.1
  Bottom 0.15: v86.08,14.13 86.08,14.34 85.94,14.47 v85.94,18.91
N$18  (via drill 0.3)
  Top 0.15: v87.46,14.61 87.46,15.37 J1.18 | v89.75,17.38 89.54,17.38 88.5,18.42 83.86,18.42 82.61,19.67 EPD_C6.1
  Bottom 0.15: v87.46,14.61 87.46,15.1 v89.75,17.38
N$26  (via drill 0.3)
  Top 0.15: v92.24,13.37 93.9,15.03 93.9,15.37 J1.5 | v89.4,10.53 79.55,10.53 76.87,7.85 76.87,5.05 76.24,4.43 EPD_C2.1
  Bottom 0.15: v89.4,10.53 v92.24,13.37
N$27
  Top 0.15: J1.4 94.46,15.44 94.46,17.45 97.3,20.29 98.27,20.29 98.47,20.08 98.47,16.69 94.18,12.4 83.79,12.4 83.31,11.91 78.6,11.91 76.24,9.56 EPD_C1.1
PREVGH  (via drill 0.3)
  Top 0.15: v88.22,13.64 85.94,13.64 85.59,13.99 85.59,14.27 85.87,14.54 85.87,15.37 J1.21 | v92.93,17.8 92.93,18.63 EPD_C9.1 | v79.22,40.23 79.22,43.14 D5.1
  Bottom 0.15: 90.75,16.17 92.38,17.8 v92.93,17.8 | 90.75,16.17 v88.22,13.64 | v79.22,40.23 79.22,33.79 95.7,17.31 95.7,16.14 95.22,15.65 91.27,15.65 90.75,16.17
PREVGL  (via drill 0.3)
  Top 0.15: v84.76,14.61 84.9,14.75 84.9,15.37 J1.23 | v81.51,20.22 80.68,21.05 80.68,24.31 88.09,31.72 D4.2 | v83.38,11.43 84.07,12.12 97.02,12.12 101.59,16.69 EPD_C11.1
  Bottom 0.15: v81.51,20.22 81.51,17.87 v84.76,14.61 84.76,14.54 83.38,13.16 v83.38,11.43
RESE  (via drill 0.3)
  Top 0.15: v94.94,16.41 94.94,15.44 J1.3 | v76.66,20.71 66.27,31.09 Q3.2 66.27,31.16 67.03,31.92 67.03,32.76 66.76,33.03 66.76,35.52 R3.2
  Bottom 0.15: v94.94,16.41 90.65,20.71 v76.66,20.71
RESE'  (via drill 0.3)
  Top 0.15: R2.2 62.95,11.49 62.95,15.23 SJ1.2 63.02,15.3 v65.37,17.66 | v65.37,20.15 65.37,35.52 R3.1
  Bottom 0.15: v65.37,17.66 v65.37,20.15
RESET  (via drill 0.3)
  Top 0.15: 48.34,108.44 50.69,108.44 RESSET_BUTTON.3 | 48.34,108.44 47.3,108.44 RESSET_BUTTON.4 | v46.81,104.84 46.81,93.69 IC2.1 | R_RESET.1 45.77,106.02 45.84,105.95 v46.54,105.95 46.54,106.02 52.01,106.02 C5.1 | v15.03,54.91 15.03,48.82 10.04,43.84 10.04,43.35 U2.3 | v48.34,107.82 48.34,108.44
  Bottom 0.15: v15.03,54.91 15.03,57.41 13.37,59.07 13.37,59.35 43.97,89.96 44.53,89.96 46.81,92.24 v46.81,104.84 46.81,105.67 v46.54,105.95 46.54,106.02 v48.34,107.82
RTC_RST  (via drill 0.3)
  Top 0.15: v26.52,59.83 23.41,59.83 22.71,60.52 22.71,60.8 U2.16 | v90.16,63.02 90.16,62.46 90.79,61.84 U3.4
  Bottom 0.15: v26.52,59.83 59.14,59.83 62.33,63.02 v90.16,63.02
RX  (via drill 0.3)
  Top 0.15: v13.85,59.21 12.53,60.52 12.53,60.8 U2.24 | v85.39,100.62 TP2.TP
  Bottom 0.15: v13.85,59.21 19.8,59.21 21.47,60.87 45.64,60.87 v85.39,100.62
SCK  (via drill 0.3)
  Top 0.15: v23.27,23.48 24.1,23.48 R6.1 | D10.2 24.1,19.8 v23.27,20.64 18.63,20.64 17.04,19.04 16,19.04 15.79,18.84 15.79,17.66 24.31,9.14 TP8.TP 24.17,8.93 v25.9,10.66 | v14.4,42.17 13.85,42.73 13.85,43.28 U2.6 13.78,43.35 13.78,43.56 v12.88,44.46 | v3.88,91.13 4.22,91.48 4.99,91.48 J4.P5 | v89.68,16.2 89.89,16 89.89,15.44 J1.13 | v45.84,50.76 45.84,51.38 U1.6
  Bottom 0.15: v23.27,20.64 v23.27,23.48 23.27,30.54 19.67,34.14 19.67,38.02 15.17,42.52 14.89,42.52 14.54,42.17 v14.4,42.17 | v3.88,91.13 3.88,90.3 9.07,85.11 9.07,48.27 v12.88,44.46 | v89.68,16.2 84.14,10.66 45.84,10.66 | v25.9,10.66 45.84,10.66 | 45.84,10.66 v45.84,50.76
SCL  (via drill 0.3)
  Top 0.15: v153.67,12.88 153.67,10.87 R2-PINH.1 | v153.67,15.58 153.67,16.69 SENSOR2.4 | v156.78,15.44 165.09,15.44 J3.4 | v126.24,53.6 125.48,53.6 U4.7 | v96.95,53.6 96.74,53.6 95.7,52.56 94.67,52.56 U3.16 | v21.33,58.52 19.67,58.52 17.66,60.52 17.66,60.8 U2.20
  Bottom 0.15: v153.67,12.88 v153.67,15.58 153.74,15.44 v156.78,15.44 156.78,15.37 158.24,13.92 158.58,13.92 158.93,14.27 158.93,33.1 133.44,58.59 130.47,58.59 126.1,54.22 126.1,53.67 v126.24,53.6 v96.95,53.6 96.95,56.51 92.31,61.15 60.87,61.15 58.24,58.52 v21.33,58.52
SDA  (via drill 0.3)
  Top 0.15: R1-PINH.1 151.1,10.8 149.23,8.93 140.65,8.93 138.85,10.73 138.85,11.01 145.56,17.73 152,17.73 152.77,16.97 152.77,16.76 SENSOR2.3 152.84,16.69 153.04,16.48 v153.04,15.79 | v158.44,14.4 J3.3 | v126.59,54.08 125.48,54.08 U4.8 | v93.97,51.31 93.97,51.87 U3.15 | v20.22,59 18.91,60.32 18.91,60.8 U2.19
  Bottom 0.15: v158.44,14.4 156.78,16.07 153.32,16.07 v153.04,15.79 149.79,15.79 120.56,45.01 120.56,48.2 120.7,48.34 120.7,53.12 | v126.59,54.08 126.59,53.88 126.73,53.74 126.73,53.46 126.38,53.12 120.7,53.12 | 95.77,53.12 120.7,53.12 | v93.97,51.31 95.77,53.12 | v20.22,59 21.19,58.03 58.17,58.03 61.01,60.87 92.17,60.87 95.77,57.27 95.77,53.12
SRC  (via drill 0.3)
  Top 0.15: Q3.3 68.42,31.79 70.15,31.79 75.14,36.77 L1.1 75.21,36.84 75.21,41.55 76.24,42.59 76.24,42.66 | v88.64,38.78 91.41,38.78 C4.2 | 76.24,42.66 v77.42,42.66 | 76.24,42.66 75.76,43.14 D5.2
  Bottom 0.15: v88.64,38.78 81.3,38.78 v77.42,42.66
SS_SD  (via drill 0.3)
  Top 0.15: v35.52,21.95 35.52,23.48 R10.1 | v35.25,20.71 35.25,20.08 35.52,19.8 D8.2 | v36.42,25.07 36.15,25.35 27.84,25.35 26.59,26.59 26.59,27.21 14.47,39.33 13.5,39.33 11.29,41.55 11.29,43.28 U2.4 11.29,43.35 v11.29,44.46 | v7.89,85.66 5.4,88.16 J4.P2
  Bottom 0.15: v35.25,20.71 35.52,20.98 v35.52,21.95 35.52,22.02 36.42,22.92 v36.42,25.07 | v7.89,85.66 7.89,47.85 v11.29,44.46
TOPPOWER
  pour Top: 79.97,10.22 79.99,10.24 99.08,10.24 99.1,10.22 99.12,10.2 99.14,10.18 99.14,0.08 175.18,0.08 175.18,67.23 92.69,67.23 92.67,67.25 92.65,67.27 92.63,67.29 92.63,111.68 0.08,111.68 0.08,62.31 6.37,62.31 6.39,62.29 6.41,62.27 6.43,62.25 6.43,41.89 6.41,41.87 6.39,41.85 6.37,41.83 0.08,41.83 0.08,0.08 79.93,0.08 79.93,10.18 79.95,10.2
  pour Bottom: 100.39,10.12 100.37,10.1 100.35,10.08 99.14,10.08 99.14,0.08 175.18,0.08 175.18,67.23 92.69,67.23 92.67,67.25 92.65,67.27 92.63,67.29 92.63,111.68 0.08,111.68 0.08,62.31 6.37,62.31 6.39,62.29 6.41,62.27 6.43,62.25 6.43,41.89 6.41,41.87 6.39,41.85 6.37,41.83 0.08,41.83 0.08,0.08 79.93,0.08 79.93,10.18 79.95,10.2 79.97,10.22 79.99,10.24 100.35,10.24 100.37,10.22 100.39,10.2 100.41,10.18 100.41,10.14
TX  (via drill 0.3)
  Top 0.15: v11.49,59.69 11.29,59.9 11.29,60.8 U2.25 | v83.24,108.58 85.02,106.8 TP1.TP
  Bottom 0.15: v11.49,59.69 11.49,99.03 21.05,108.58 v83.24,108.58
USB_D+  (via drill 0.3)
  Top 0.15: v158.44,58.79 157.47,58.79 D1.1 | v89.06,58.86 v95.22,58.86 | v24.79,43 24.24,43 23.96,43.28 U2.14
  Bottom 0.15: v158.44,58.79 133.65,58.79 133.58,58.86 v95.22,58.86 | v89.06,58.86 60.25,58.86 52.91,51.52 36.29,51.52 27.77,43 v24.79,43
USB_D-  (via drill 0.3)
  Top 0.15: v156.5,60.25 156.85,60.59 157.41,60.59 D1.3 | v93.83,60.25 92.52,60.25 92.17,59.9 v89.47,59.9 | v25.9,43.49 24.72,42.31 23.41,42.31 22.71,43 22.71,43.28 U2.13
  Bottom 0.15: v93.83,60.25 v156.5,60.25 | v89.47,59.9 60.87,59.9 52.77,51.8 36.15,51.8 27.84,43.49 v25.9,43.49
VBAT  (via drill 0.3)
  Top 0.15: U4.3 123.47,53.12 123.47,53.53 U4.2 123.4,53.6 123.13,53.6 122.85,53.88 122.85,54.29 123.2,54.64 | Q1.3 124.51,49.38 128.6,49.38 135.45,56.23 135.45,60.11 134.97,60.59 134.69,60.59 MCP73831.3 134.62,60.59 134.34,60.59 133.86,60.11 132.2,60.11 131.23,59.14 131.23,58.03 131.37,57.89 131.37,54.64 C2_BAT.1 131.3,54.64 123.2,54.64 | v121.95,57.34 121.95,60.94 TP3.TP | 123.2,54.64 v123.2,56.09
  Bottom 0.15: v123.2,56.09 v121.95,57.34
VBUS
  Top 0.3: 151.31,60.25 154.01,60.25 154.57,59.69 154.91,59.69 D1.5 155.05,59.76 155.4,59.76 155.88,60.25 155.88,60.39 157.06,61.56 159.97,61.56 C5_USB.1 | 151.31,60.25 148.61,60.25 C4_USB.1 148.47,60.39 136.22,60.39 135.38,61.22 132.75,61.22 132.2,60.66 MCP73831.4 131.99,60.59 126.66,60.59 125.76,59.69 TP14.TP 125.62,59.62 125,59.62 118.83,53.46 C1_BAT.1 | 151.31,60.25 151.31,53.39 R1_PMF.2 | C1_BAT.1 118.69,53.39 117.52,54.57 115.09,54.57 CHG_LED.A 115.02,54.43 102.91,42.31 102.91,38.78 R1_PWUSB.2 | C1_BAT.1 118.76,53.18 123.47,48.48 123.47,47.3 Q1.1 123.61,47.16 124.44,46.33 124.44,35.39 D2.2
VRTC
  Top 0.3: 87.25,57.76 80.05,57.76 C8.1 | 87.25,57.76 92.03,52.98 92.03,52.56 U3.14 92.17,53.05 92.93,53.81 96.4,53.81 100.97,58.38 R_CAPACITOR.2 | C10_SUPERCAP.2 88.78,68.56 88.78,65.51 88.92,65.37 88.92,59.49 87.32,57.89 87.25,57.76
VUSB
  Top 0.3: J2.A4 163.98,51.8 163.98,52.01 J2.B9 | J2.A9 163.98,56.78 163.98,56.58 J2.B4 164.12,56.51 164.68,56.51 164.81,56.37 164.81,52.28 164.61,52.08 164.12,52.08 J2.B9 | J2.B9 163.84,52.08 157.06,52.08 155.81,53.32 R1_PMF.1